# EAGLE board A-FINAL_BOARD (EAGLE 9.6.2)
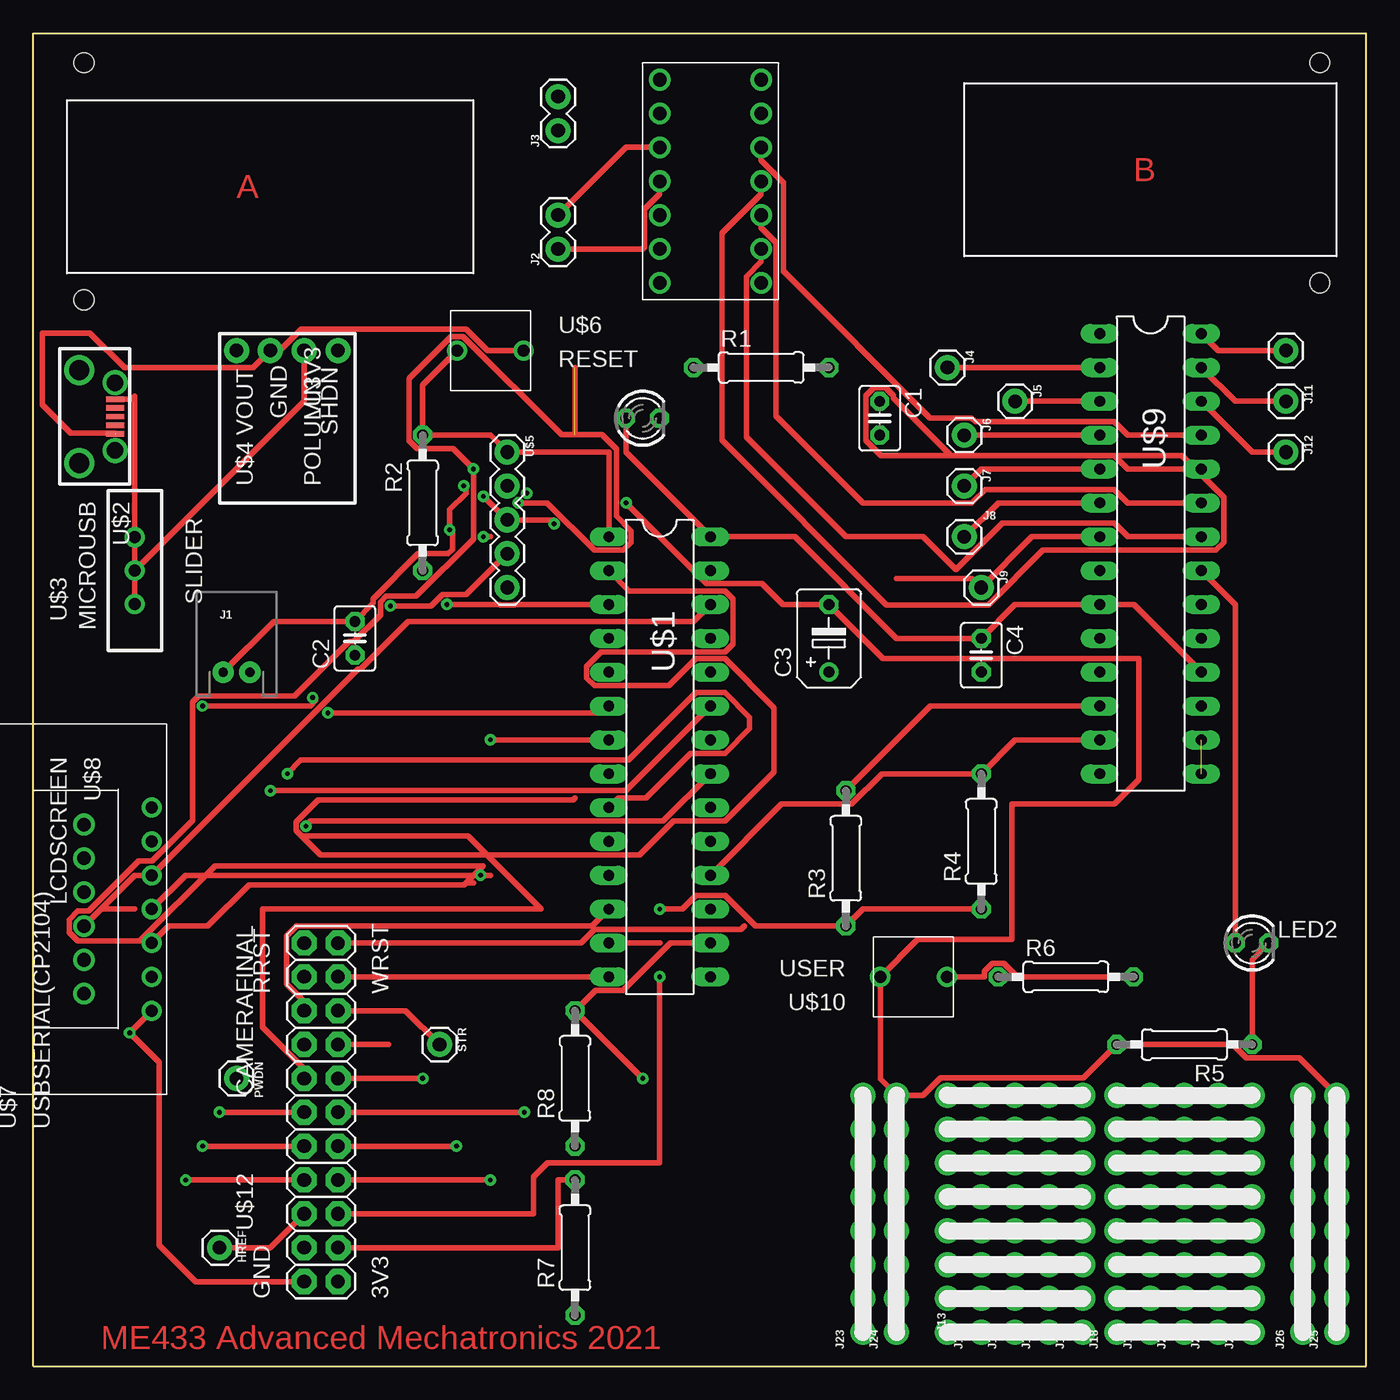
[diagram p0: board, top side]
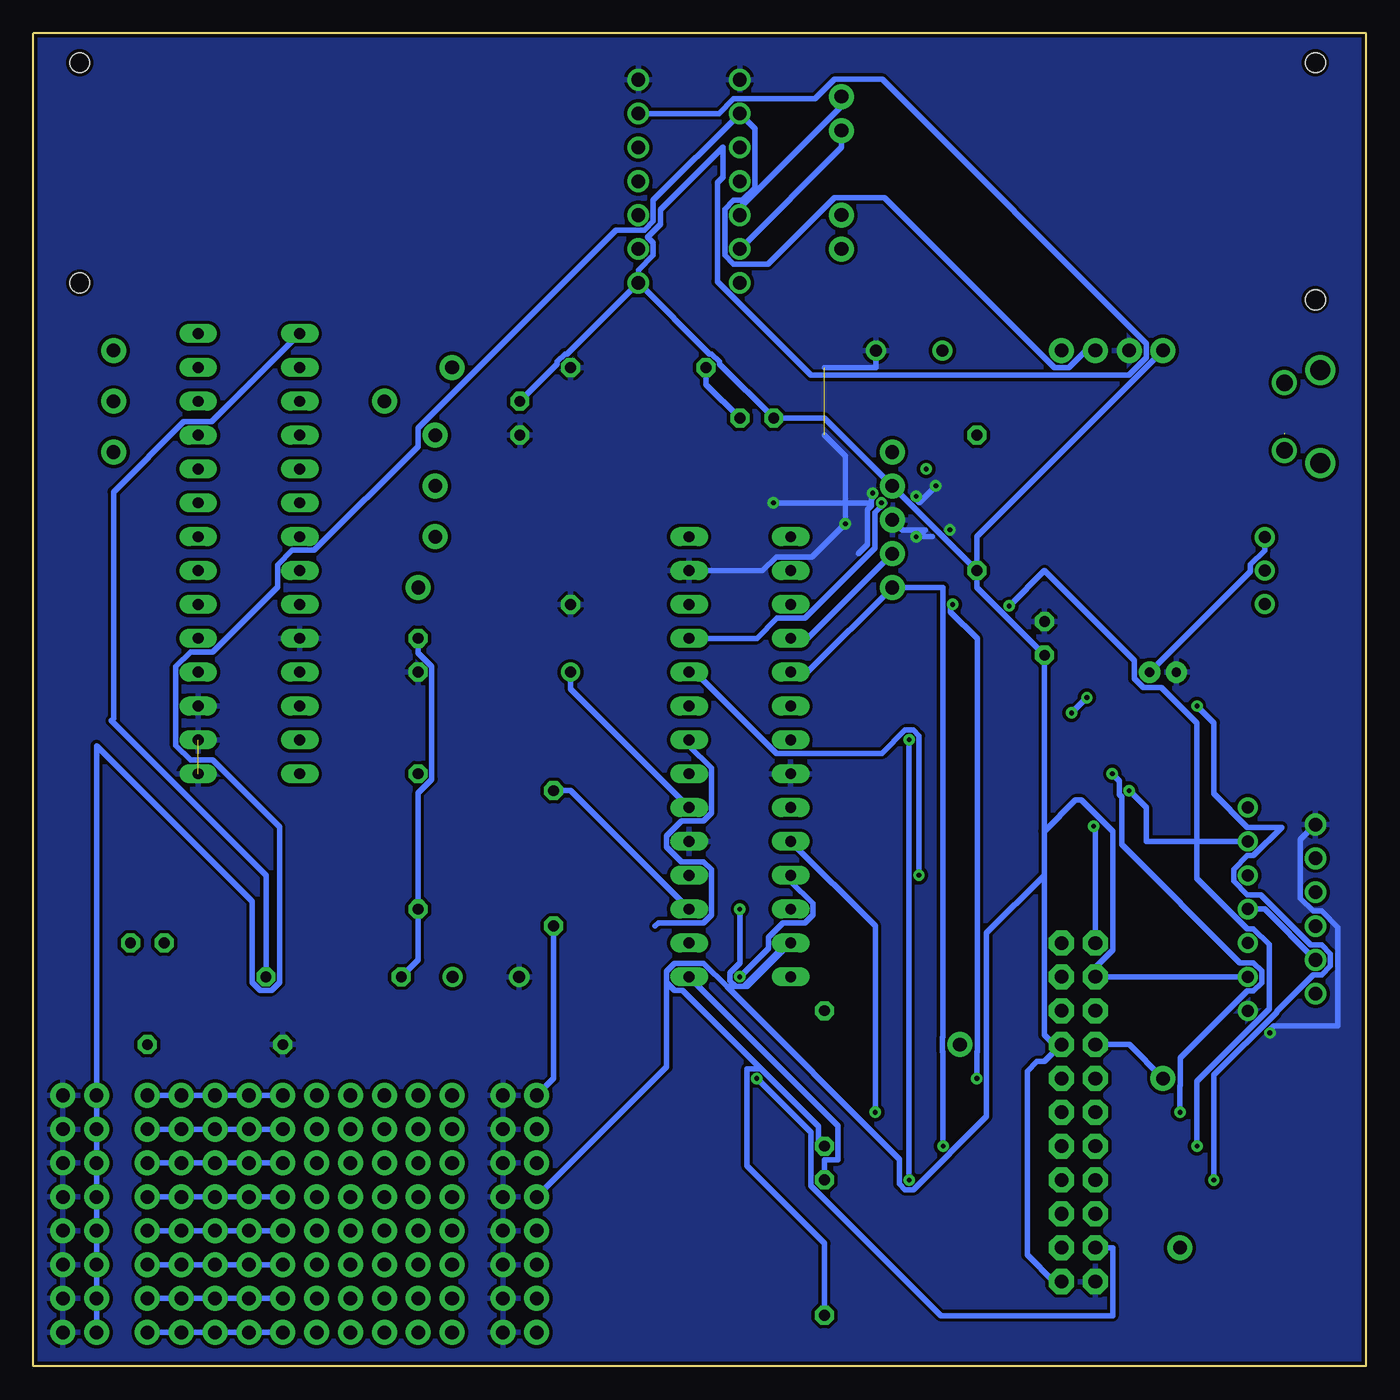
[diagram p1: board, bottom side, seen from below]

Size 100 x 100 mm. Coordinates in mm from the lower left corner, seen from the top.
Outline: 0,0 0,100 100,100 100,0 0,0
Copper layers (1*16): Top 0.035mm / dielectric 1.5mm / Bottom 0.035mm
Design rules "SparkFun": minimum track width 8mil, minimum drill 20mil, track to track 8mil, track to pad 8mil, pad to pad 8mil, via to via 8mil, smd to smd 8mil, copper to edge 8mil, drill to drill 8mil, minimum pad ring 12mil, minimum via ring 10mil, stop-mask expansion 4mil, vias tented up to drill 20mil, thermal gap 10mil
Holes 1.5 mm at 3.81,80.01 3.81,97.79 96.52,97.79 96.52,81.28

## Footprints (pad centres in the part's own frame; a part is rotated, then mirrored left to right if it is on the bottom)
C025-030X050 = drill 0.813 octagon: 1 -1.27,0; 2 1.27,0
B45181B = drill 0.813: + -2.54,0 | drill 0.813 octagon: - 2.54,0
1X01 = drill 1.016 pad 1.88: 1 0,0
JST-2-PTH-NS = drill 0.7 pad 1.6: 1 -1,0; 2 1,0
1X02 = drill 1.016 pad 1.88: 1 0,0; 2 2.54,0
1X08 = drill 1.016 pad 1.88: 1 0,0; 2 2.54,0; 3 5.08,0; 4 7.62,0; 5 10.16,0; 6 12.7,0; 7 15.24,0; 8 17.78,0
LED3MM = drill 0.813 octagon: A -1.27,0; K 1.27,0
0207/10 = drill 0.813 octagon: 1 -5.08,0; 2 5.08,0
DIL28-3 = drill 0.813 long: 1 -16.51,-3.81; 2 -13.97,-3.81; 3 -11.43,-3.81; 4 -8.89,-3.81; 5 -6.35,-3.81; 6 -3.81,-3.81; 7 -1.27,-3.81; 8 1.27,-3.81; 9 3.81,-3.81; 10 6.35,-3.81; 11 8.89,-3.81; 12 11.43,-3.81; 13 13.97,-3.81; 14 16.51,-3.81; 15 16.51,3.81; 16 13.97,3.81; 17 11.43,3.81; 18 8.89,3.81; 19 6.35,3.81; 20 3.81,3.81; 21 1.27,3.81; 22 -1.27,3.81; 23 -3.81,3.81; 24 -6.35,3.81; 25 -8.89,3.81; 26 -11.43,3.81; 27 -13.97,3.81; 28 -16.51,3.81
MICROUSB = smd 0.4 x 1.35: 1.VBUS -1.3,2.7; 2 -0.65,2.7; 3 0,2.7; 4 0.65,2.7; 5.GND 1.3,2.7 | drill 1.25 pad 1.676: P$6 -2.54,2.7; P$7 2.54,2.7 | drill 1.5: P$8 -3.5,0; P$9 3.5,0
SLIDE = drill 0.9: 1 -2.5,0; 2 0,0; 3 2.5,0
POLULU3V3 = drill 1.016 pad 1.88: 1 0,3.81; 2 0,1.27; 3 0,-1.27; 4 0,-3.81
1X05 = drill 1.016 pad 1.88: 1 0,0; 2 2.54,0; 3 5.08,0; 4 7.62,0; 5 10.16,0
PUSH = drill 0.9: P$1 -2.5,0; P$2 2.5,0
USBSERIAL(CP2104) = drill 1.02: 1 -6.35,2.54; 2 -3.81,2.54; 3 -1.27,2.54; 4 1.27,2.54; 5 3.81,2.54; 6 6.35,2.54
LCDSCREEN = drill 0.9: 1. 7.62,38.1; 2. 5.08,38.1; 3. 2.54,38.1; 4. 0,38.1; 5. -2.54,38.1; 6. -5.08,38.1; 7. -7.62,38.1
MCPI/OEXPANDER = drill 0.813 long: 1 -16.51,-3.81; 2 -13.97,-3.81; 3 -11.43,-3.81; 4 -8.89,-3.81; 5 -6.35,-3.81; 6 -3.81,-3.81; 7 -1.27,-3.81; 8 1.27,-3.81; 9 3.81,-3.81; 10 6.35,-3.81; 11 8.89,-3.81; 12 11.43,-3.81; 13 13.97,-3.81; 14 16.51,-3.81; 15 16.51,3.81; 16 13.97,3.81; 17 11.43,3.81; 18 8.89,3.81; 19 6.35,3.81; 20 3.81,3.81; 21 1.27,3.81; 22 -1.27,3.81; 23 -3.81,3.81; 24 -6.35,3.81; 25 -8.89,3.81; 26 -11.43,3.81; 27 -13.97,3.81; 28 -16.51,3.81
HBRIDGE(DRV8835) = drill 1.02: 1 -3.81,15.24; 2 -3.81,12.7; 3 -3.81,10.16; 4 -3.81,7.62; 5 -3.81,5.08; 6 -3.81,2.54; 7 -3.81,0; 8 3.81,0; 9 3.81,2.54; 10 3.81,5.08; 11 3.81,7.62; 12 3.81,10.16; 13 3.81,12.7; 14 3.81,15.24
CAMERA_FINAL = drill 1.016 pad 1.88 octagon: 1 -13.97,-1.27; 2 -13.97,1.27; 3 -11.43,-1.27; 4 -11.43,1.27; 5 -8.89,-1.27; 6 -8.89,1.27; 7 -6.35,-1.27; 8 -6.35,1.27; 9 -3.81,-1.27; 10 -3.81,1.27; 11 -1.27,-1.27; 12 -1.27,1.27; 13 1.27,-1.27; 14 1.27,1.27; 15 3.81,-1.27; 16 3.81,1.27; 17 6.35,-1.27; 18 6.35,1.27; 19 8.89,-1.27; 20 8.89,1.27; 21 11.43,-1.27; 22 11.43,1.27

## Placement (x,y rotation side)
C1  0.1uF  [C025-030X050]  63.5,71.12 270 top
C2  0.1uF  [C025-030X050]  24.13,54.61 90 top
C3  [B45181B]  59.69,54.61 90 top
C4  0.1uF  [C025-030X050]  71.12,53.34 270 top
HREF  [1X01]  13.97,8.89 270 top
J1  [JST-2-PTH-NS]  15.24,52.07 0 top
J2  [1X02]  39.37,83.82 90 top
J3  [1X02]  39.37,92.71 90 top
J4  [1X01]  68.58,74.93 270 top
J5  [1X01]  73.66,72.39 270 top
J6  [1X01]  69.85,69.85 270 top
J7  [1X01]  69.85,66.04 270 top
J8  [1X01]  69.85,62.23 270 top
J9  [1X01]  71.12,58.42 270 top
J10  [1X01]  93.98,76.2 270 top
J11  [1X01]  93.98,72.39 270 top
J12  [1X01]  93.98,68.58 270 top
J13  [1X08]  68.58,2.54 90 top
J14  [1X08]  71.12,2.54 90 top
J15  [1X08]  73.66,2.54 90 top
J16  [1X08]  76.2,2.54 90 top
J17  [1X08]  78.74,2.54 90 top
J18  [1X08]  81.28,2.54 90 top
J19  [1X08]  83.82,2.54 90 top
J20  [1X08]  86.36,2.54 90 top
J21  [1X08]  88.9,2.54 90 top
J22  [1X08]  91.44,2.54 90 top
J23  [1X08]  62.23,2.54 90 top
J24  [1X08]  64.77,2.54 90 top
J25  [1X08]  97.79,2.54 90 top
J26  [1X08]  95.25,2.54 90 top
LED1  RED  [LED3MM]  45.72,71.12 0 top
LED2  GREEN  [LED3MM]  91.44,31.75 0 top
PWDN  [1X01]  15.24,21.59 270 top
R1  330  [0207/10]  54.61,74.93 0 top
R2  10k  [0207/10]  29.21,64.77 90 top
R3  10k  [0207/10]  60.96,38.1 90 top
R4  10k  [0207/10]  71.12,39.37 90 top
R5  330  [0207/10]  86.36,24.13 180 top
R6  10k  [0207/10]  77.47,29.21 0 top
R7  4.7k  [0207/10]  40.64,8.89 90 top
R8  4.7k  [0207/10]  40.64,21.59 90 top
STR  [1X01]  30.48,24.13 270 top
U$1  PIC32MX170F256B  [DIL28-3]  46.99,45.72 270 top
U$2  MICROUSB  [MICROUSB]  3.43,71.25 270 top
U$3  SLIDER  [SLIDE]  7.62,59.69 90 top
U$4  POLULU3V3  [POLULU3V3]  19.05,76.2 90 top
U$5  SNAP  [1X05]  35.56,68.58 270 top
U$6  RESET  [PUSH]  34.29,76.2 0 top
U$7  USBSERIAL(CP2104)  [USBSERIAL(CP2104)]  6.35,34.29 90 top
U$8  LCDSCREEN  [LCDSCREEN]  -29.21,34.29 270 top
U$9  MCPI/OEXPANDER  [MCPI/OEXPANDER]  83.82,60.96 270 top
U$10  USER  [PUSH]  66.04,29.21 180 top
U$11  HBRIDGE(DRV8835)  [HBRIDGE(DRV8835)]  50.8,81.28 0 top
U$12  CAMERAFINAL  [CAMERA_FINAL]  21.59,20.32 90 top

## Library data of the parts
C1 C2 C4 = LIBRARY; SPICEPREFIX: C
C3 = rcl; SPICEPREFIX: C
HREF J1-J12 LED1 LED2 PWDN STR U$1-U$12 = LIBRARY
J13-J26 = LIBRARY; PROD_ID: CONN-08438
R1-R8 = LIBRARY; SPICEPREFIX: R

## Nets
+3V3: C1.1 C2.1 C4.1 J23.1 J23.2 J23.3 J23.4 J23.5 J23.6 J23.7 J23.8 LED1.A R2.1 R3.1 R4.1 R6.1 R7.1 R8.1 U$1.13 U$1.28 U$4.1 U$5.2 U$8.2. U$9.9 U$9.18 U$11.8 U$11.13 U$12.1 U$12.15 U$12.20
+5V: U$2.1.VBUS U$3.1
ADIR: U$9.22 U$11.9
APWM: U$9.23 U$11.10
B0-PGD-D4: U$1.4 U$5.4 U$12.10
B1-PGC-D5: U$1.5 U$5.5 U$12.9
B6: R7.2 U$1.15 U$12.3
B7: R8.2 U$1.16 U$12.4
B8: R3.2 U$1.17 U$9.12
B9: R4.2 U$1.18 U$9.13
B12: U$1.23 U$8.6.
B13: U$1.24 U$7.2 U$8.4.
B14: U$1.25 U$8.3.
B15: U$1.26 U$7.3 U$8.5.
BDIR: U$9.24 U$11.11
BPWM: U$9.25 U$11.12
D0: U$1.2 U$12.14
D1: U$1.3 U$12.13
D2: U$1.9 U$12.12
D3: U$1.10 U$12.11
D6: U$1.6 U$12.8
D7: U$1.7 U$12.7
GND: C1.2 C2.2 C3.- C4.2 J1.1 J24.1 J24.2 J24.3 J24.4 J24.5 J24.6 J24.7 J24.8 J25.1 J25.2 J25.3 J25.4 J25.5 J25.6 J25.7 J25.8 R1.2 R5.2 U$1.8 U$1.19 U$1.27 U$2.5.GND U$4.2 U$5.3 U$6.P$2 U$7.6 U$8.1. U$9.10 U$9.15 U$9.16 U$9.17 U$10.P$2 U$11.1 U$11.14 U$12.2
MCLR: R2.2 U$1.1 U$5.1 U$6.P$1
N$1: LED1.K R1.1
N$2: LED2.A U$9.21
N$3: C3.+ U$1.20
N$4: LED2.K R5.1
N$5: R6.2 U$9.1 U$10.P$1
N$6: J2.2 U$11.3
N$7: J2.1 U$11.4
N$8: J3.2 U$11.5
N$9: J3.1 U$11.6
N$10: HREF.1 U$12.6
N$11: PWDN.1 U$12.16
N$12: STR.1 U$12.17
N$13: J4.1 U$9.2
N$14: J5.1 U$9.3
N$15: J6.1 U$9.4
N$16: J7.1 U$9.5
N$17: J8.1 U$9.6
N$18: J9.1 U$9.7
N$19: J10.1 U$9.28
N$20: J11.1 U$9.27
N$21: J12.1 U$9.26
N$22: J18.8 J19.8 J20.8 J21.8 J22.8
N$23: J13.8 J14.8 J15.8 J16.8 J17.8
N$24: J18.7 J19.7 J20.7 J21.7 J22.7
N$25: J18.6 J19.6 J20.6 J21.6 J22.6
N$26: J18.5 J19.5 J20.5 J21.5 J22.5
N$27: J18.4 J19.4 J20.4 J21.4 J22.4
N$28: J18.3 J19.3 J20.3 J21.3 J22.3
N$29: J18.2 J19.2 J20.2 J21.2 J22.2
N$30: J18.1 J19.1 J20.1 J21.1 J22.1
N$31: J13.7 J14.7 J15.7 J16.7 J17.7
N$32: J13.6 J14.6 J15.6 J16.6 J17.6
N$33: J13.5 J14.5 J15.5 J16.5 J17.5
N$34: J13.4 J14.4 J15.4 J16.4 J17.4
N$35: J13.3 J14.3 J15.3 J16.3 J17.3
N$36: J13.2 J14.2 J15.2 J16.2 J17.2
N$37: J13.1 J14.1 J15.1 J16.1 J17.1
RCK: U$1.12 U$12.18
RESET: U$1.21 U$12.22
V+: J1.2 U$3.3
VIN: J26.1 J26.2 J26.3 J26.4 J26.5 J26.6 J26.7 J26.8 U$3.2 U$4.3 U$11.2
VSY: U$1.11 U$12.5
WR: U$1.14 U$12.19
WRST: U$1.22 U$12.21

## Tracks (layer width: path | path; a pad name or v marks a point on that pad's centre or on a via)
+3V3  (via drill 0.35)
  Top 0.406: U$12.15 26.67,24.13 | U$9.18 82.55,57.15 U$9.9 73.66,57.15 C4.1 64.77,54.61 57.15,62.23 U$1.28 44.45,68.58 LED1.A | R4.1 62.23,34.29 R3.1 54.17,33.02 51.88,35.31 49.72,35.31 48.7,34.29 v46.99,34.29 | U$1.13 47.03,31.75 | J23.8 J23.7 J23.6 J23.5 J23.4 J23.3 J23.2 J23.1
  Bottom 0.406: C1.1 60.71,75.18 60.71,75.35 60.11,75.95 59.94,75.95 U$11.8 | U$11.8 49.28,75.95 49.11,75.95 48.51,75.35 48.51,75.18 LED1.A 40.64,71.12 U$5.2 R2.1 | C4.1 71.12,53.51 70.1,52.49 70.1,44.03 71.12,43.01 R4.1 71.12,30.48 R6.1 | J23.8 60.96,21.59 R3.1 | U$4.1 29.21,62.23 R2.1 | R2.1 29.21,58.42 C2.1 24.13,36.85 24.16,36.83 | U$11.8 54.61,82.23 53.49,83.36 53.49,84.28 53.9,84.69 52.93,85.66 52.93,86.77 48.26,91.44 48.26,89.22 48.67,88.81 48.67,81.38 41.64,74.35 17.8,74.35 16.48,75.66 16.48,76.74 36.29,96.55 39.91,96.55 41.35,95.1 47.45,95.1 48.58,93.98 U$11.13 | U$8.2. U$12.20 20.32,29.92 19.02,31.21 19.02,40.13 21.36,42.47 21.82,42.47 24.16,40.13 24.16,36.83 | 24.16,36.83 24.16,24.86 23.42,24.13 U$12.15 24.13,22.86 24.69,22.86 25.43,22.13 25.43,8.35 23.42,6.35 U$12.1 | v46.99,34.29 46.99,30.25 47.72,29.51 47.72,28.91 47.29,28.48 46.69,28.48 43.41,31.75 U$1.13 46.45,28.48 47.97,28.48 | 52.48,28.79 51.88,28.19 51.29,28.19 45.42,22.32 | R7.1 40.64,9.2 46.45,15.02 46.45,22.32 45.42,22.32 | R8.1 41.1,16.97 41.1,18 45.42,22.32 | 52.48,28.79 52.48,29.63 51.88,30.23 49.72,30.23 47.97,28.48 | 52.48,28.79 52.48,22.45 J23.5 | 24.16,36.83 28.48,32.51 28.48,18.75 33.99,13.24 34.59,13.24 35.02,13.67 35.02,15.53 47.97,28.48
+5V
  Top 0.406: U$2.1.VBUS 7.4,72.55 7.62,72.77 U$3.1
ADIR
  Top 0.406: U$9.22 82.11,62.23 81.09,63.25 72.7,63.25 69.22,59.76 66.75,62.23 60.96,62.23 53.49,69.7 53.49,81.74 54.61,82.86 U$11.9
APWM
  Top 0.406: U$9.23 82.11,64.77 81.09,65.79 71.43,65.79 70.39,64.75 62.26,64.75 55.73,71.27 55.73,84.28 54.61,85.41 U$11.10
B0-PGD-D4  (via drill 0.35)
  Top 0.406: U$12.10 v12.7,16.51 | v26.79,57.03 29.86,57.03 30.71,57.88 32.48,57.88 U$5.4
  Bottom 0.406: U$1.4 41.91,54.61 U$5.4 | v12.7,16.51 12.7,21.36 7.27,26.79 7.27,31.63 8.45,32.81 8.91,32.81 12.7,36.6 12.7,48.26 15.35,50.91 16.72,50.91 17.4,51.59 17.4,52.96 24.13,59.69 v26.79,57.03 26.91,56.91
B1-PGC-D5  (via drill 0.35)
  Top 0.406: U$12.9 v31.75,16.51
  Bottom 0.406: U$1.5 41.91,52.07 U$5.5 31.75,58.42 31.75,24.69 31.77,24.67 31.77,23.59 31.75,23.57 v31.75,16.51
B6
  Top 0.406: U$12.3 39.37,8.89 39.37,13.97 R7.2
  Bottom 0.406: R7.2 40.64,15.49 39.62,15.49 39.62,18.03 U$1.15
B7  (via drill 0.35)
  Top 0.406: U$1.16 47.82,31.75 44.26,28.19 42.16,28.19 R8.2 v45.72,21.59
  Bottom 0.406: v45.72,21.59 41.66,17.53 41.66,13.55 31.89,3.79 19.02,3.79 19.02,8.89 U$12.4
B8
  Top 0.406: R3.2 67.31,49.53 U$9.12
  Bottom 0.406: U$1.17 59.69,43.18 R3.2
B9
  Top 0.406: U$9.13 73.66,46.99 R4.2 63.67,44.45 61.38,42.16 56.13,42.16 U$1.18
B12  (via drill 0.35)
  Top 0.406: v17.78,43.18 44.45,43.18 U$1.23
  Bottom 0.406: U$8.6. 16.51,39.37 16.51,41.91 v17.78,43.18
B13  (via drill 0.35)
  Top 0.406: U$8.4. 11.43,36.83 v33.56,36.83 34.29,36.83
  Bottom 0.406: U$7.2 7.62,34.29 U$8.4. | U$1.24 50.36,52.07 44.26,45.97 36.34,45.97 34.59,47.72 33.99,47.72 33.56,47.29 v33.56,36.83
B14  (via drill 0.35)
  Top 0.406: U$8.3. 10.16,33.02 13.1,33.02 16.2,36.12 32.31,36.12 32.46,36.27 | 32.46,36.27 33.73,37.54 13.64,37.54 8,31.9 3.35,31.9 2.69,32.56 2.69,33.48 3.35,34.14 4.14,34.14 7.89,37.89 8.91,37.89 11.97,40.95 11.97,49.83 12.4,50.26 19.62,50.26 23.71,54.36 24.04,54.36 26.05,56.37 26.05,57.34 26.48,57.77 28.73,57.77 33.02,62.06 v33.02,67.31 31.5,68.83 28.79,68.83 28.19,69.43 28.19,74.1 31.35,77.26 32.23,77.26 39.61,69.88 40.64,69.88 | 32.46,36.27 33.02,36.27 | v36.37,64.77 38.54,64.77 42.1,61.21 44.26,61.21 44.86,61.81 44.86,62.65 43.74,63.77 43.74,68.81 42.67,69.88 40.64,69.88 | 40.64,69.88 40.64,74.93
  Bottom 0.406: U$1.25 45.72,54.61 44.2,56.13 42.1,56.13 36.85,61.38 36.85,64.04 36.12,64.77 v36.37,64.77
B15
  Top 0.406: U$1.26 49.53,55.88 28.11,55.88 24.55,52.32 24.38,52.32 U$8.5. 7.62,36.83 5.08,34.29 | U$7.3 5.08,34.29 | 5.08,34.29 | 5.08,34.29 7.62,34.29
BDIR
  Top 0.406: U$9.24 82.11,67.31 81.09,68.33 | 81.09,68.33 68.83,68.33 | U$11.11 54.61,87.94 51.66,85 51.66,69.47 64,57.12 71.66,57.12 75.75,61.21 88.71,61.21 89.31,61.81 89.31,65.19 86.17,68.33 81.09,68.33 | 68.83,68.33 63.59,68.33 62.48,69.43 62.48,72.81 63.08,73.41 63.92,73.41 64.52,72.81 64.52,72.64 68.83,68.33
BPWM
  Top 0.406: U$9.25 82.11,69.85 81.09,70.87 70.67,70.87 70.39,71.14 67.28,71.14 56.29,82.14 56.29,88.81 54.61,90.48 U$11.12
D0  (via drill 0.35 pad 0.55)
  Top 0.406: U$12.14 20.32,22.3 17.2,25.42 17.2,34.29 38.1,34.29 32.61,39.78 20.14,39.78 | 20.14,39.78 19.71,40.21 19.71,40.82 21.36,42.47 40.49,42.47 40.64,42.62 | U$1.2 44.7,58.17 51.88,58.17 52.48,57.57 52.48,54.19 51.88,53.59 42.61,53.59 41.5,52.49 41.5,51.65 42.1,51.05 47.69,51.05 49.72,53.09 51.88,53.09 55.58,49.39 55.58,44.59 51.88,40.89 48.03,40.89 45.49,38.35 21.57,38.35 20.14,39.78
  other vias: 43.18,59.69
D1  (via drill 0.35)
  Top 0.406: U$12.13 v29.21,21.59 | v31.02,57.15 35,57.15 35.02,57.12 36.1,57.12 36.12,57.15 U$1.3
  Bottom 0.406: v29.21,21.59 29.21,23.57 29.18,23.59 29.18,54.59 31.19,56.59 31.19,57.15 v31.02,57.15
D2  (via drill 0.35)
  Top 0.406: U$12.12 v13.97,19.05 | U$1.9 43.89,42.62 45.95,42.62 49.3,45.97 51.88,45.97 53.75,47.84 53.75,48.68 51.88,50.55 49.72,50.55 44.64,45.47 20.07,45.47 v19.05,44.45
  Bottom 0.406: v13.97,19.05 13.97,21.03 13.95,21.05 13.95,23.11 8.91,28.15 8.45,28.15 7.83,28.77 7.83,29.65 8.45,30.27 9.47,30.27 18.34,39.14 18.34,42.7 18.51,42.88 18.51,43.91 v19.05,44.45
D3  (via drill 0.35)
  Top 0.406: U$12.11 v36.83,19.05
  Bottom 0.406: v36.83,19.05 36.83,33.02 U$1.10
D6  (via drill 0.35)
  Top 0.406: U$12.8 v11.43,13.97 | v12.7,49.53 20.8,49.53 21.2,49.92 v20.95,50.16 | v22.11,49.01 42.66,49.01 U$1.6
  Bottom 0.406: v12.7,49.53 11.43,48.26 11.43,42.95 8.91,40.43 6.33,40.43 8.45,38.31 8.91,38.31 9.95,37.27 9.95,36.39 8.91,35.35 7.89,35.35 4.14,31.6 3.35,31.6 2.69,30.94 2.69,30.02 3.35,29.36 3.98,29.36 6.71,26.62 6.71,26.56 11.43,21.84 v11.43,13.97 | v20.95,50.16 v22.11,49.01
D7  (via drill 0.35, 0.35 pad 0.55)
  Top 0.406: U$12.7 v34.29,13.97 | v34.29,46.99 U$1.7
  Bottom 0.406: v34.29,13.97 v34.29,46.99
GND  (via drill 0.35, 0.35 pad 0.55)  (3 unrouted)
  Top 0.406: 6.13,70 2.81,70 0.68,72.13 0.68,77.5 4.25,77.5 6.84,74.91 16.48,74.91 U$4.2 18.49,76.2 20.11,77.82 32.46,77.82 34.08,76.2 U$6.P$2 | U$8.1. v7.23,25.01 9.43,22.81 9.43,9.06 12.16,6.33 20.3,6.33 U$12.2 | v39.07,63.2 39.07,63.45 39.02,63.5 U$5.3 35.52,63.5 v33.75,65.27 | J1.1 18.05,55.88 C2.2 25.49,57.24 25.49,57.57 28.88,60.96 31.13,60.96 31.44,61.27 31.44,62.54 v31.23,62.75 31.23,64.25 32.46,65.48 32.46,66.04 v32.29,66.04 | 34.29,62.23 v33.75,62.23 33.58,62.23 | J24.1 J24.2 J24.3 J24.4 J24.5 J24.6 J24.7 J24.8 | J25.1 J25.2 J25.3 J25.4 J25.5 J25.6 J25.7 J25.8 95,23.11 91.02,23.11 90,24.13 R5.2 78.77,21.61 68.04,21.61 66.75,20.32 J24.8 | J24.8 63.54,21.55 U$10.P$2 66.33,32 73.41,32 73.41,42.16 81.09,42.16 82.96,44.03 82.96,53.09 63.75,53.09 C3.- 56.23,57.15 54.65,58.73 50.49,58.73 44.45,64.77 v44.47,64.77 | 36.85,65.33 v37.03,65.5
  Bottom 0.406: U$7.6 4.93,39.52 4.93,35.1 3.98,34.14 3.35,34.14 2.13,32.92 2.13,25.55 6.93,25.55 7.35,25.13 v7.23,25.01 | U$1.27 45.28,59.69 44.26,60.71 41.57,60.71 v39.07,63.2 39.07,68.28 40.64,69.85 | U$6.P$2 36.79,74.91 40.64,74.91 | U$5.3 34.81,62.75 33.06,62.75 33.58,62.23 v33.75,62.23 32.54,62.23 | v31.23,62.75 31.48,62.75 | v32.29,66.04 33.53,64.8 33.75,65.02 v33.75,65.27 | v44.47,64.77 37.1,64.77 | 37.1,64.77 37.1,65.07 37.03,65.15 v37.03,65.5 | 37.1,64.77 37.1,64.58 37.41,64.27 37.41,61.65 38.1,60.96
  pour Bottom (isolate 0.254): 0,100.33 100.33,100.33 100.33,0 0,0
MCLR
  Top 0.406: U$1.1 43.18,68.58 U$5.1 34.29,69.85 R2.2 29.21,73.62 U$6.P$1
N$1
  Bottom 0.406: LED1.K 49.53,73.66 R1.1
N$2
  Top 0.406: U$9.21 90.17,57.15 LED2.A
N$3
  Bottom 0.406: U$1.20 59.69,50.8 C3.+
N$4
  Top 0.406: R5.1 91.44,30.48 LED2.K
N$5
  Top 0.406: U$10.P$1 71.37,29.21 71.37,29.63 71.97,30.23 72.81,30.23 73.83,29.21 R6.2
  Bottom 0.406: U$9.1 86.61,70.87 88.71,70.87 93.98,65.6 93.98,48.61 94.15,48.43 82.55,36.83 R6.2
N$6
  Top 0.406: J2.2 44.45,91.44 U$11.3
N$7
  Top 0.406: J2.1 45.72,83.82 45.87,83.97 45.87,86.82 46.99,87.94 U$11.4
N$8
  Bottom 0.406: U$11.5 46.99,86.92 39.37,94.54 J3.2
N$9
  Bottom 0.406: U$11.6 39.37,91.44 J3.1
N$10
  Top 0.406: HREF.1 17.78,8.89 U$12.6
N$11
  Bottom 0.406: PWDN.1 17.78,24.13 U$12.16
N$12
  Top 0.406: U$12.17 27.94,26.67 STR.1
N$13
  Top 0.406: J4.1 U$9.2
N$14
  Top 0.406: J5.1 U$9.3
N$15
  Top 0.406: J6.1 U$9.4
N$16
  Top 0.406: J7.1 71.12,67.31 U$9.5
N$17
  Top 0.406: J8.1 72.39,64.77 U$9.6
N$18
  Top 0.406: U$9.7 74.93,62.23 J9.1 70.43,59.11 64.77,59.11
N$19
  Top 0.406: J10.1 88.9,76.2 U$9.28
N$20
  Top 0.406: J11.1 90.17,72.39 U$9.27
N$21
  Top 0.406: J12.1 91.44,68.58 U$9.26
N$22
  Top 0.406: J22.8 J21.8 J20.8 J19.8 J18.8
  Bottom 0.406: J18.8 J22.8
N$23
  Top 0.406: J13.8 J14.8 J15.8 J16.8 J17.8
N$24
  Top 0.406: J18.7 J19.7 J20.7 J21.7 J22.7
  Bottom 0.406: J22.7 J18.7
N$25
  Top 0.406: J22.6 J21.6 J20.6 J19.6 J18.6
  Bottom 0.406: J18.6 J22.6
N$26
  Top 0.406: J18.5 J19.5 J20.5 J21.5 J22.5
  Bottom 0.406: J22.5 J18.5
N$27
  Top 0.406: J22.4 J21.4 J20.4 J19.4 J18.4
  Bottom 0.406: J18.4 J22.4
N$28
  Top 0.406: J18.3 J19.3 J20.3 J21.3 J22.3
  Bottom 0.406: J22.3 J18.3
N$29
  Top 0.406: J22.2 J21.2 J20.2 J19.2 J18.2
  Bottom 0.406: J18.2 J22.2
N$30
  Top 0.406: J18.1 J19.1 J20.1 J21.1 J22.1
  Bottom 0.406: J22.1 J18.1
N$31
  Top 0.406: J17.7 J16.7 J15.7 J14.7 J13.7
N$32
  Top 0.406: J13.6 J14.6 J15.6 J16.6 J17.6
N$33
  Top 0.406: J17.5 J16.5 J15.5 J14.5 J13.5
N$34
  Top 0.406: J13.4 J14.4 J15.4 J16.4 J17.4
N$35
  Top 0.406: J17.3 J16.3 J15.3 J14.3 J13.3
N$36
  Top 0.406: J13.2 J14.2 J15.2 J16.2 J17.2
N$37
  Top 0.406: J13.1 J14.1 J15.1 J16.1 J17.1
RCK
  Top 0.406: U$1.12 41.91,33.02 19.76,33.02 19.02,32.29 19.02,28.67 20.32,27.38 U$12.18
RESET  (via drill 0.35)
  Top 0.406: U$1.21 47.24,40.89 20.82,40.89 v20.44,40.52
  Bottom 0.406: U$12.22 20.32,40.64 v20.44,40.52
V+
  Bottom 0.406: J1.2 8.68,59.63 8.68,60.13 7.62,61.19 U$3.3
VIN
  Top 0.406: U$3.2 20.32,72.39 U$4.3 | J26.8 J26.7 J26.6 J26.5 J26.4 J26.3 J26.2 J26.1
  Bottom 0.406: U$4.3 21.03,76.2 22.32,74.91 23.4,74.91 36.15,87.66 39.91,87.66 44.86,82.7 47.45,82.7 48.11,83.36 48.11,86.82 47.45,87.48 46.83,87.48 45.87,88.44 45.87,92.86 U$11.2 53.49,87.48 53.49,85.9 54.15,85.24 56.29,85.24 71.14,70.39 71.14,69 78.93,61.21 80.58,61.21 81.69,60.11 81.69,58.46 86.55,53.59 88.2,53.59 89.31,52.49 89.31,46.57 88.2,45.47 86.55,45.47 81.53,40.45 81.53,28.79 82.13,28.19 82.97,28.19 83.57,28.79 83.57,34.86 95.25,46.55 J26.8 J26.1
VSY  (via drill 0.35)
  Top 0.406: U$12.5 37.54,11.43 37.54,14.2 38.58,15.24 46.99,15.24 v46.99,29.21
  Bottom 0.406: v46.99,29.21 44.86,31.34 44.86,32.17 43.75,33.27 42.1,33.27 41.5,33.87 41.5,34.71 43.18,36.39 U$1.11
WR
  Top 0.406: U$12.19 U$1.14
WRST  (1 unrouted)
  Top 0.406: U$12.21 41.08,31.75 42.1,32.77 53.09,32.77 53.34,33.02
  Bottom 0.406: U$1.22 50.8,46.55 49.12,44.87 49.12,41.49 49.72,40.89 51.37,40.89 52.48,39.79 52.48,38.95 51.37,37.85 49.72,37.85 49.12,37.25 49.12,33.87 49.72,33.27 53.09,33.27 53.34,33.02

## Text on the board
Top: B | A | ME433 Advanced Mechatronics 2021